# Altium PCB motorturn.PcbDoc
Units mm, origin at the board's own origin, x right, y up, seen from the top; angles counter-clockwise.
Board outline 24.79 x 30 mm, 2 copper layers (Top Layer, Bottom Layer); 3 components, 2 nets, 6 pads, 3 vias.
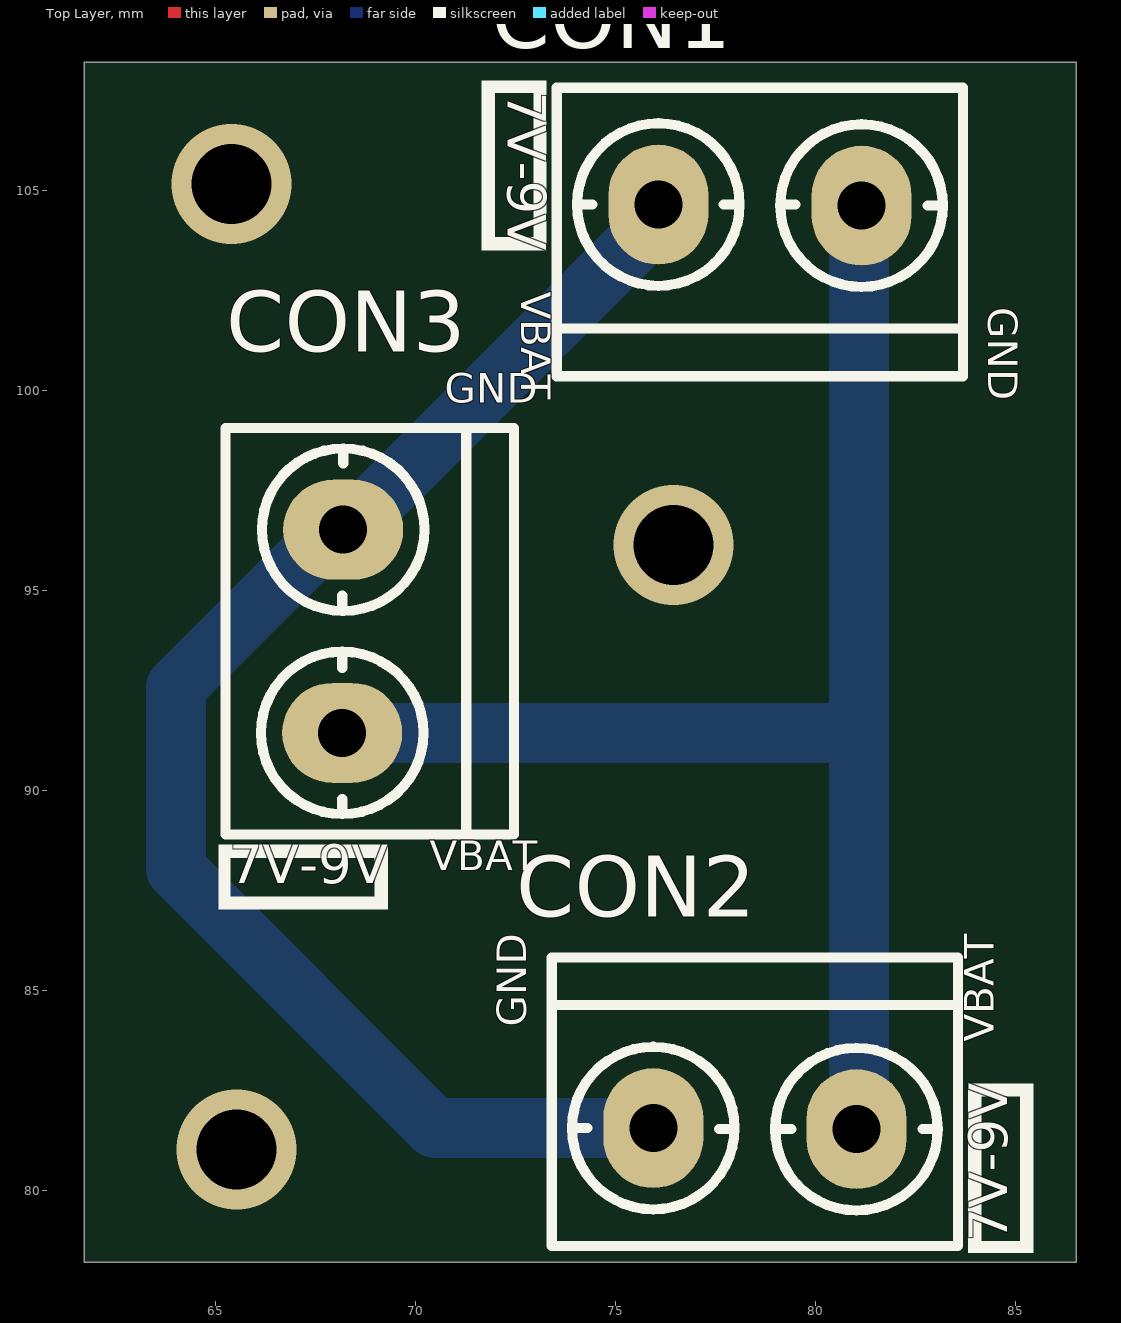
[diagram p0: Top Layer view]
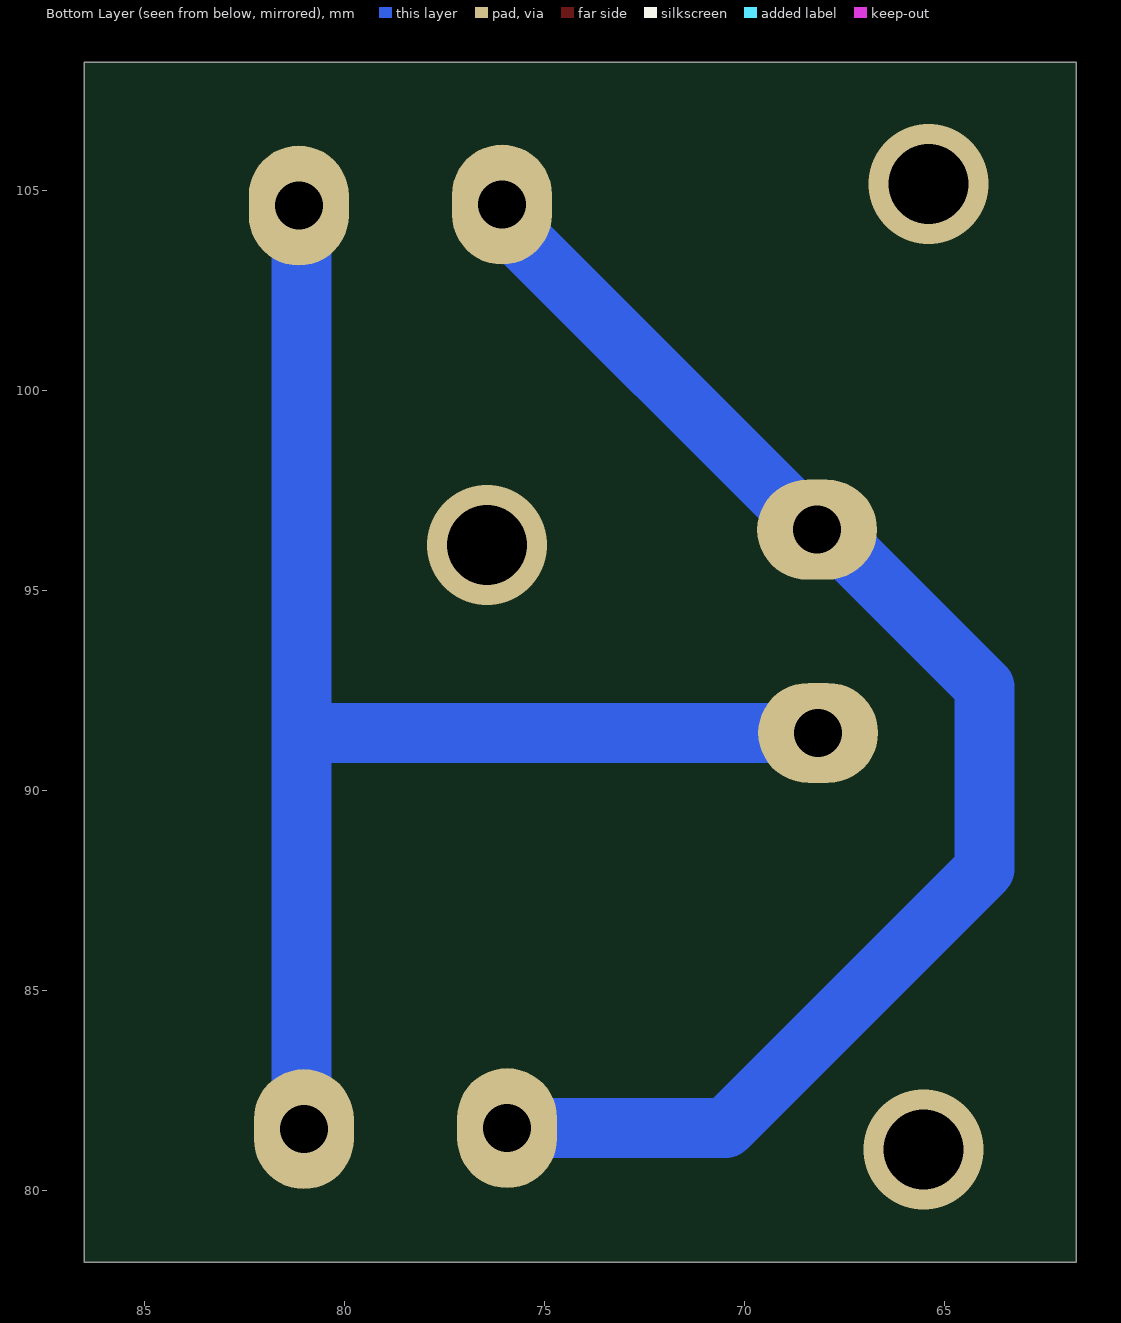
[diagram p1: Bottom Layer view, seen from below]
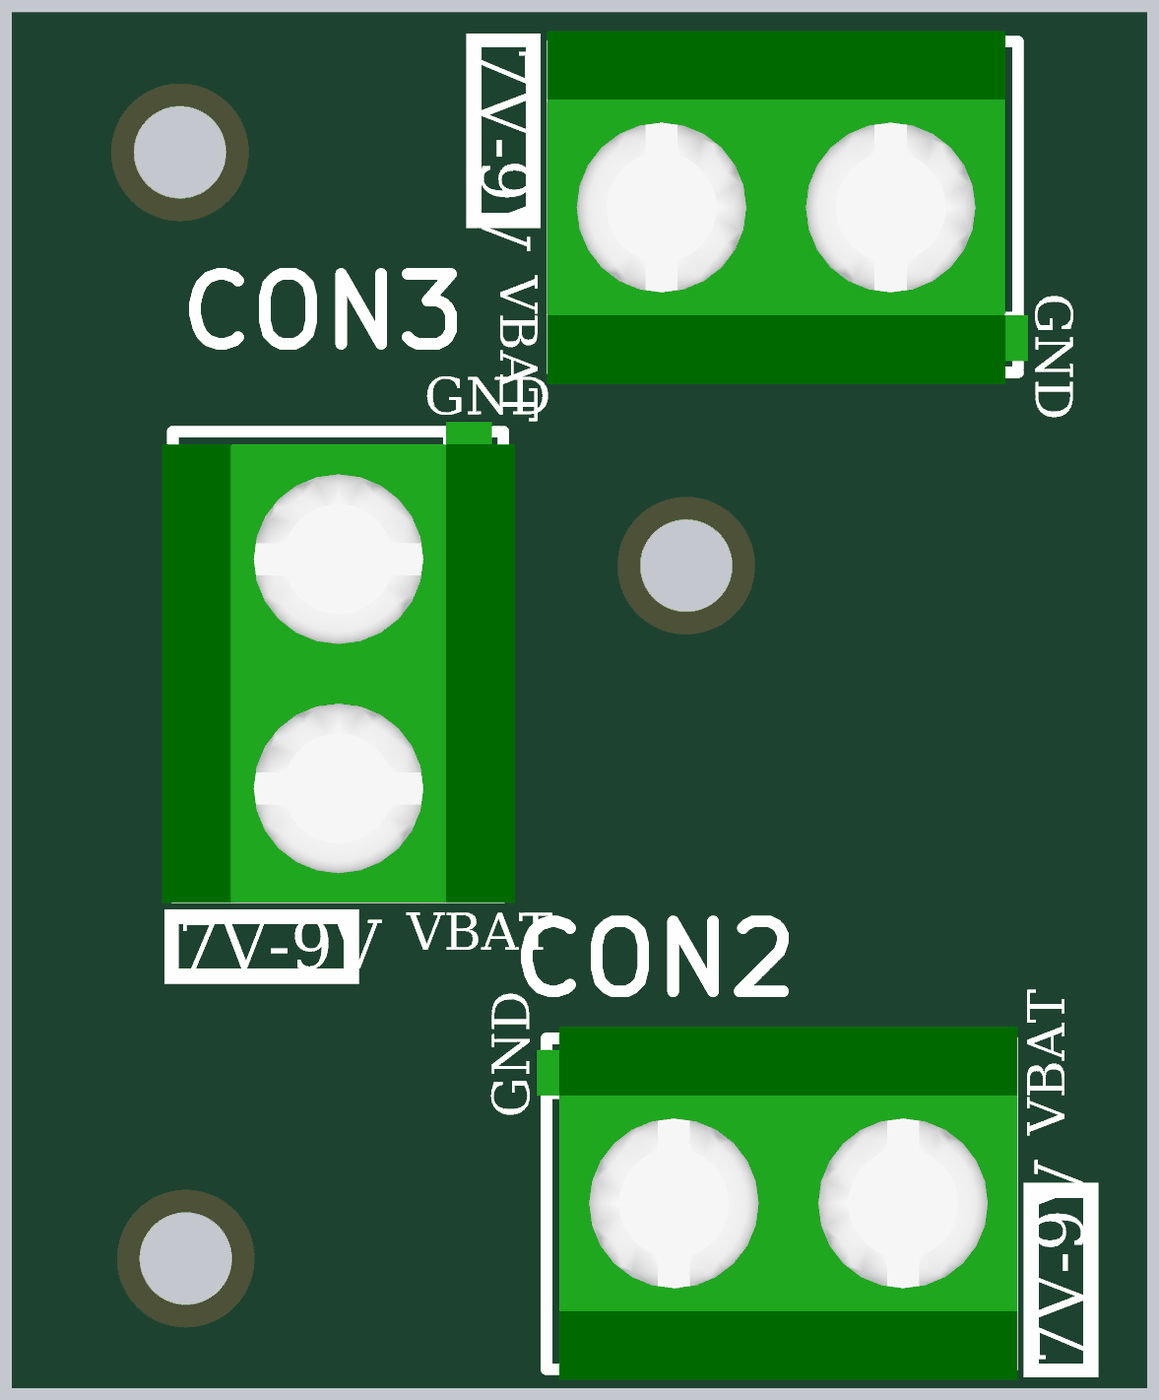
[diagram p2: 3D render of the assembled board from above, using the file's embedded part models]

## Layer stack, top to bottom
Top Solder: solder mask 0.0102, Solder Resist, Dk 3.5
Top Layer: signal copper 0.0356
Dielectric 1: dielectric 0.32, FR-4, Dk 4.8
Bottom Layer: signal copper 0.0356
Bottom Solder: solder mask 0.0102, Solder Resist, Dk 3.5

## Board outline
61.722,78.204 61.722,108.204 86.515,108.204 86.515,78.204

## Design rules (kind name [scope] priority, off if disabled: settings)
Clearance [All] p1: gap=0.254 ignorepadtopadclearanceinfootprint=FALSE except(0: Arc-Hole Track-Hole SMDPad-Hole THPad-Hole Via-Hole Fill-Hole Poly-Hole Region-Hole Text-Hole)
PolygonConnect [All] p1: connectstyle=Relief reliefconductorwidth=0.254 reliefentries=4 polygonreliefangle="90 Angle" airgapwidth=0.254
RoutingVias [All] p1: holewidth=0.711 width=1.27 viastyle="Through Hole" minholewidth=0.711 minwidth=1.27 maxholewidth=0.711 maxwidth=1.27
SolderMaskExpansion [All] p1: expansion=0.102
Width [All] p1: maxlimit=1.5 minlimit=1.5 preferedwidth=1.5 minimp=50.000000 maximp=50.000000 favimp=50.000000
30 further rules are at their usual default settings.

## Components (designator, comment, footprint, x,y, rotation, side; value= is the part's Value field where it differs from the comment)
CON1 "MHDR1X2" CON 77.521,98.933 r270 top
CON2 "MHDR1X2" CON 79.578,87.249 r90 top
CON3 "MHDR1X2" CON 73.885,92.888 r0 top

## Footprints (in the part's own frame and the unit in brackets; to place one, negate y for a bottom-side part, rotate by r counter-clockwise, add the part's x,y. Pads: shape width x height; smd on the part's side, far side on the other; paste and mask are expansions set on the pad)
CON [mm]
  oval 3x2.5 hole 1.2: 1(-5.715,-1.448) 2(-5.69,3.632)
  silkscreen extent -8.81,-5.87 -1.42,6.17, body extent -8.87,-4.11 -1.17,6.39, height 10

## Part data
CON1 CON2 CON3: "Header, 2-Pin", LatestRevisionDate=17-Jul-2002, LatestRevisionNote="Re-released for DXP Platform.", Publisher="Altium Limited"

## Via types
v1: diameter 3, hole 2, Top Layer to Bottom Layer, tented both sides, 3 vias

## Nets (pads, with @x,y where several pads share a name; then routed paths per layer and width w, separated by ;. In a path a pad name is that pad's centre, name@x,y a point inside that pad or via, vN(x,y) a via of type N, cw(c..) or ccw(c..) an arc to the next point about the centre after c; other vN are vias at no path point)
NetCON1_1: CON1.1 CON2.2 CON3.2 | length 36.4
  Bottom Layer w1.5: CON2.2 70.485,81.559 64.008,88.036 64.008,92.583 67.754,96.329 68.004,96.329 CON3.2 68.32,96.52 76.073,104.273 CON1.1
NetCON1_2: CON1.2 CON2.1 CON3.1 | length 36.1
  Bottom Layer w1.5: CON3.1 81.09,91.44 ; CON2.1 81.09,81.597 81.09,91.44 ; CON1.2 81.09,104.559 81.09,91.44
copper on no net:
  other v1: 65.532,81.026 76.454,96.139 65.405,105.156

## Silkscreen, mask and mechanical layers (free items; w line width, h text height)
Mechanical 1:
  the board outline again, w0.254

## Text inside footprints (layer, text, board x,y; h text height)
CON1: Top Overlay "VBAT" at 72.39,102.464 h1.27 r270; Top Overlay "GND" at 84.074,102.083 h1.27 r270; Top Overlay "7V-9V" at 71.984,107.467 h1.65 r270
CON2: Top Overlay "VBAT" at 84.709,83.718 h1.27 r90; Top Overlay "GND" at 73.025,84.099 h1.27 r90; Top Overlay "7V-9V" at 85.115,78.715 h1.65 r90
CON3: Top Overlay "VBAT" at 70.354,87.757 h1.27; Top Overlay "GND" at 70.735,99.441 h1.27; Top Overlay "7V-9V" at 65.35,87.351 h1.65